# EAGLE board final-project (EAGLE 9.6.2)
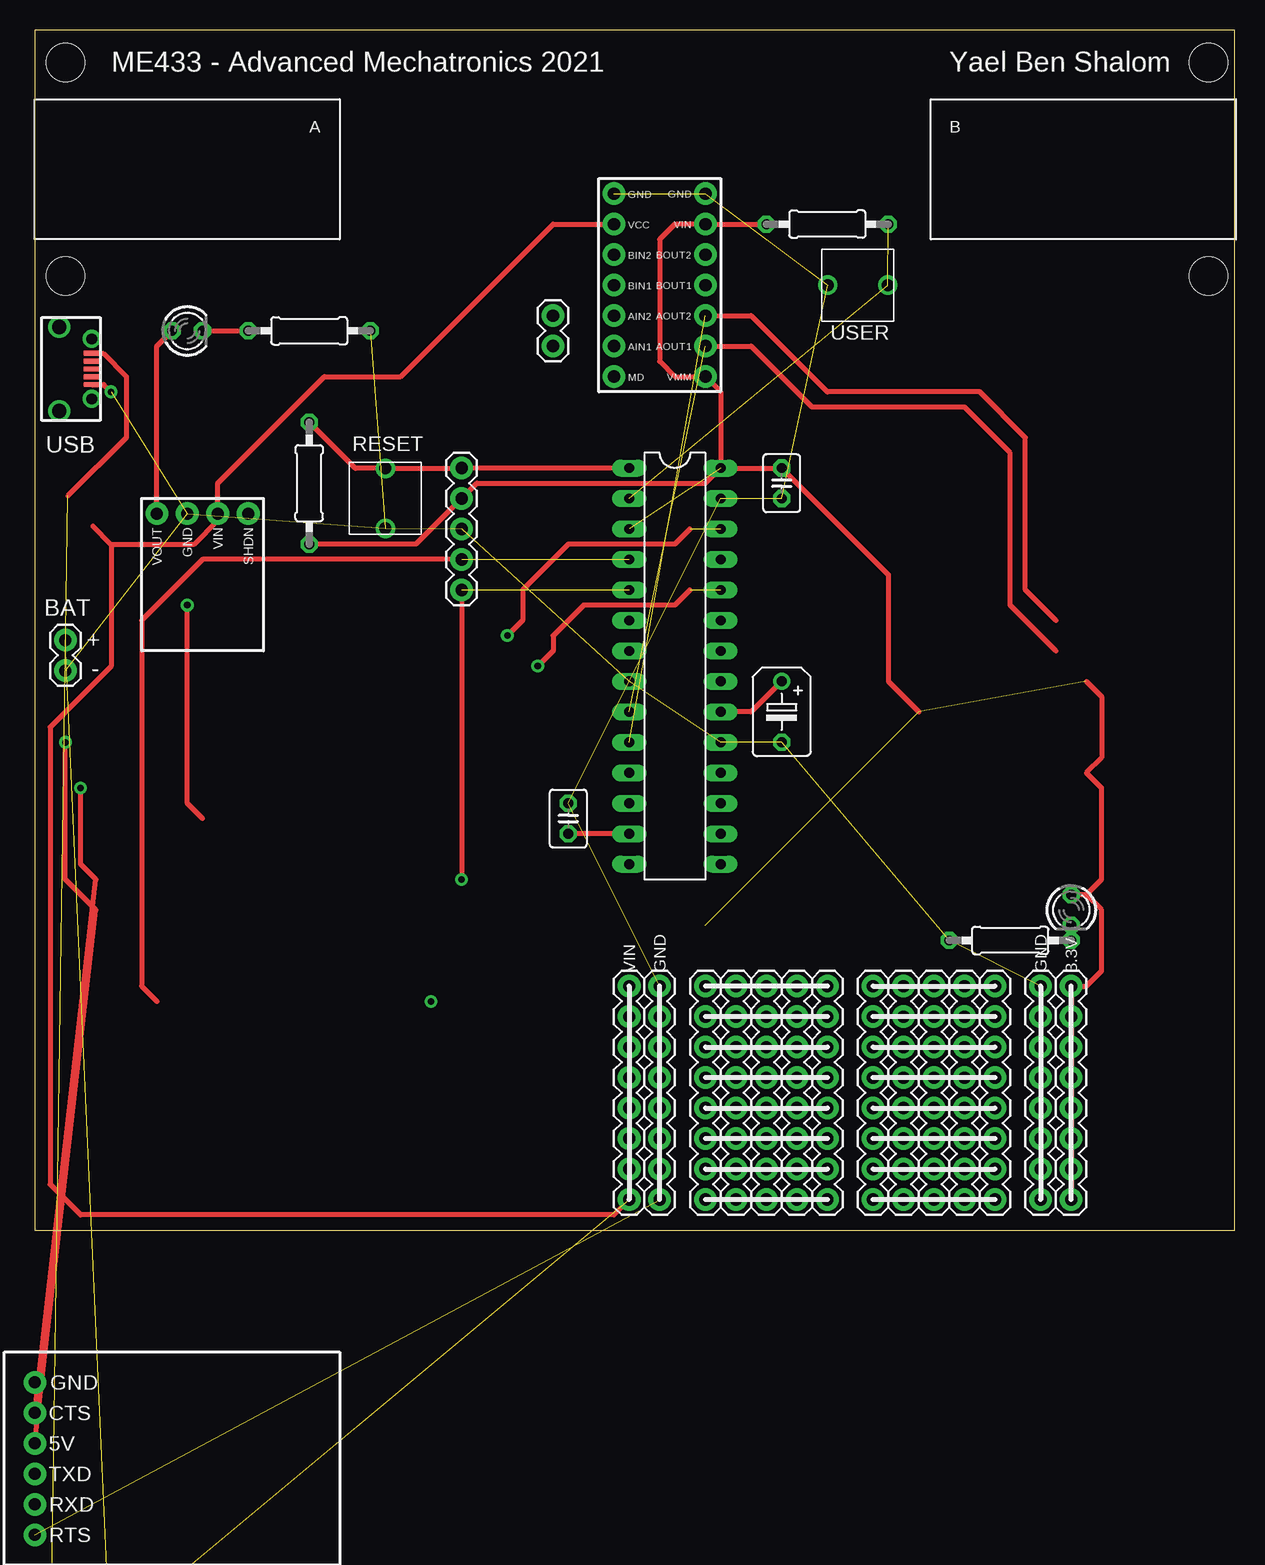
[diagram p0: board, top side]
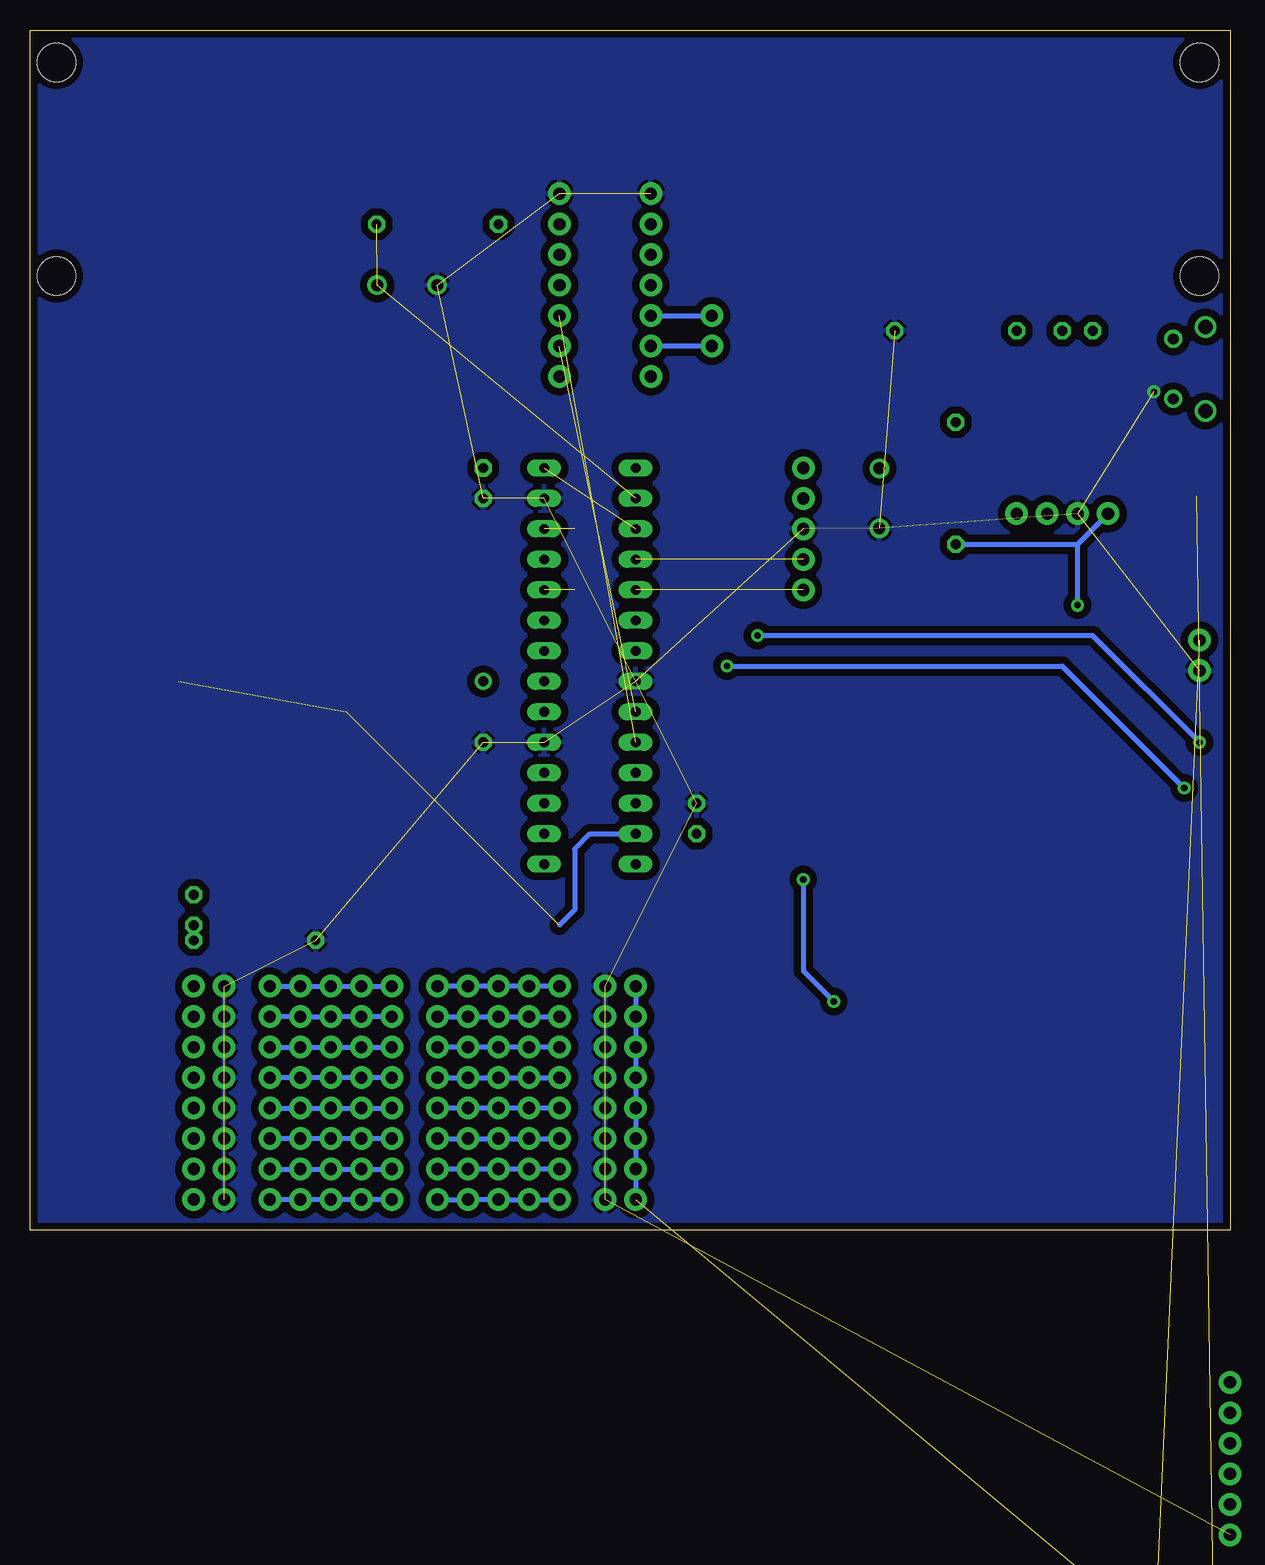
[diagram p1: board, bottom side, seen from below]

Size 100 x 100 mm. Coordinates in mm from the lower left corner, seen from the top.
Outline: 0,0 100,0 100,100 0,100 0,0
Copper layers (1*16): Top 0.035mm / dielectric 1.5mm / Bottom 0.035mm
Design rules "SparkFun": minimum track width 8mil, minimum drill 20mil, track to track 8mil, track to pad 8mil, pad to pad 8mil, via to via 8mil, smd to smd 8mil, copper to edge 8mil, drill to drill 8mil, minimum pad ring 12mil, minimum via ring 10mil, stop-mask expansion 4mil, vias tented up to drill 20mil, thermal gap 10mil
Holes 3.17 mm at 2.54,79.5 2.54,97.28 97.79,97.28 97.79,79.5

## Footprints (pad centres in the part's own frame; a part is rotated, then mirrored left to right if it is on the bottom)
1X02 = drill 1.016 pad 1.88: 1 0,0; 2 2.54,0
C025-030X050 = drill 0.813 octagon: 1 -1.27,0; 2 1.27,0
B45181B = drill 0.813: + -2.54,0 | drill 0.813 octagon: - 2.54,0
1X08 = drill 1.016 pad 1.88: 1 0,0; 2 2.54,0; 3 5.08,0; 4 7.62,0; 5 10.16,0; 6 12.7,0; 7 15.24,0; 8 17.78,0
LED3MM = drill 0.813 octagon: A -1.27,0; K 1.27,0
0207/10 = drill 0.813 octagon: 1 -5.08,0; 2 5.08,0
DIL28-3 = drill 0.813 long: 1 -16.51,-3.81; 2 -13.97,-3.81; 3 -11.43,-3.81; 4 -8.89,-3.81; 5 -6.35,-3.81; 6 -3.81,-3.81; 7 -1.27,-3.81; 8 1.27,-3.81; 9 3.81,-3.81; 10 6.35,-3.81; 11 8.89,-3.81; 12 11.43,-3.81; 13 13.97,-3.81; 14 16.51,-3.81; 15 16.51,3.81; 16 13.97,3.81; 17 11.43,3.81; 18 8.89,3.81; 19 6.35,3.81; 20 3.81,3.81; 21 1.27,3.81; 22 -1.27,3.81; 23 -3.81,3.81; 24 -6.35,3.81; 25 -8.89,3.81; 26 -11.43,3.81; 27 -13.97,3.81; 28 -16.51,3.81
SLIDE = drill 0.9: 1 -2.5,0; 2 0,0; 3 2.5,0
POLOLU3V3 = drill 1.016 pad 1.88: 1 0,3.81; 2 0,1.27; 3 0,-1.27; 4 0,-3.81
SNAP = drill 1.016 pad 1.88: 1 0,5.08; 2 0,2.54; 3 0,0; 4 0,-2.54; 5 0,-5.08
PUSH = drill 1: P$1 -2.5,0; P$2 2.5,0
FRIEND = drill 1.016 pad 1.88: 1 0,6.35; 2 0,3.81; 3 0,1.27; 4 0,-1.27; 5 0,-3.81; 6 0,-6.35
POLOLU = drill 1.016 pad 1.88: 1 -3.81,7.62; 2 -3.81,5.08; 3 -3.81,2.54; 4 -3.81,0; 5 -3.81,-2.54; 6 -3.81,-5.08; 7 -3.81,-7.62; 8 3.81,-7.62; 9 3.81,-5.08; 10 3.81,-2.54; 11 3.81,0; 12 3.81,2.54; 13 3.81,5.08; 14 3.81,7.62
MICROUSB = smd 0.4 x 1.35: 1.VBUS -1.3,2.7; 2 -0.65,2.7; 3 0,2.7; 4 0.65,2.7; 5.GND 1.3,2.7 | drill 0.9 pad 1.3: P$6 -2.5,2.7; P$7 2.5,2.7 | drill 1.2 pad 1.65: P$8 -3.5,0; P$9 3.5,0

## Placement (x,y rotation side)
BAT  [1X02]  2.54,46.61 90 top
C1  0.1uF  [C025-030X050]  44.45,34.29 90 top
C2  0.1uF  [C025-030X050]  62.23,62.23 270 top
C3  10uF  [B45181B]  62.23,43.18 270 top
J2  A  [1X02]  43.18,73.66 90 top
J16  [1X08]  66.04,2.54 90 top
J17  [1X08]  55.88,2.54 90 top
J18  [1X08]  58.42,2.54 90 top
J19  [1X08]  60.96,2.54 90 top
J20  [1X08]  63.5,2.54 90 top
J21  [1X08]  69.85,2.54 90 top
J22  [1X08]  72.39,2.54 90 top
J23  [1X08]  74.93,2.54 90 top
J24  [1X08]  77.47,2.54 90 top
J25  [1X08]  80.01,2.54 90 top
J26  [1X08]  86.36,2.54 90 top
J27  [1X08]  52.07,2.54 90 top
J28  [1X08]  83.82,2.54 90 top
J29  [1X08]  49.53,2.54 90 top
LED1  RED  [LED3MM]  12.7,74.93 0 top
LED2  GREEN  [LED3MM]  86.36,26.67 270 top
R1  330  [0207/10]  22.86,74.93 180 top
R2  10k  [0207/10]  22.86,62.23 270 top
R5  330  [0207/10]  81.28,24.13 0 top
R6  10k  [0207/10]  66.04,83.82 180 top
U1  PIC32MX170F256B  [DIL28-3]  53.34,46.99 270 top
U$1  SLIDE  [SLIDE]  3.81,-35.56 0 top  (outside the outline)
U$2  POLOLU3V3  [POLOLU3V3]  13.97,59.69 90 top
U$4  SNAP  [SNAP]  35.56,58.42 0 top
U$5  RESET  [PUSH]  29.21,60.96 90 top
U$6  FRIEND  [FRIEND]  0,-19.05 0 top  (outside the outline)
U$9  USER  [PUSH]  68.58,78.74 0 top
U$10  POLOLU  [POLOLU]  52.07,78.74 0 top
U$12  MICROUSB  [MICROUSB]  2.03,71.75 270 top

## Library data of the parts
BAT J2 LED1 LED2 U1 U$1 U$2 U$4-U$6 U$9 U$10 U$12 = ME433-2021
C1-C3 = ME433-2021; SPICEPREFIX: C
J16-J29 = ME433-2021; PROD_ID: CONN-08438
R1 R2 R5 R6 = ME433-2021; SPICEPREFIX: R

## Nets
+3V3: C1.1 C2.1 J26.1 J26.2 J26.3 J26.4 J26.5 J26.6 J26.7 J26.8 LED1.A LED2.A R2.2 R6.2 U1.3 U1.13 U1.28 U$2.1 U$4.2 U$10.8 U$10.13
+5V: U$1.1 U$12.1.VBUS
A2-ADIR: U1.9 U$10.9
A3-APWM: U1.10 U$10.10
B0-PGD: U1.4 U$4.4
B1-PGC: U1.5 U$4.5
B8-SCL: U1.17
B9-SDA: U1.18
B13-RXD: U1.24 U$6.2
B15-TXD: U1.26 U$6.3
GND: BAT.1 C1.2 C2.2 C3.- J27.1 J27.2 J27.3 J27.4 J27.5 J27.6 J27.7 J27.8 J28.1 J28.2 J28.3 J28.4 J28.5 J28.6 J28.7 J28.8 R1.1 R5.1 U1.8 U1.19 U1.27 U$2.2 U$4.3 U$5.P$1 U$6.6 U$9.P$1 U$10.1 U$10.14 U$12.5.GND
MCLR: R2.1 U1.1 U$4.1 U$5.P$2
MCLR1: R6.1 U1.2 U$9.P$2
N$1: LED1.K R1.2
N$2: C3.+ U1.20
N$5: LED2.K R5.2
N$6: J2.1 U$10.6
N$7: J2.2 U$10.5
N$21: J16.8 J17.8 J18.8 J19.8 J20.8
N$22: J16.7 J17.7 J18.7 J19.7 J20.7
N$23: J16.6 J17.6 J18.6 J19.6 J20.6
N$24: J16.5 J17.5 J18.5 J19.5 J20.5
N$25: J16.4 J17.4 J18.4 J19.4 J20.4
N$26: J16.3 J17.3 J18.3 J19.3 J20.3
N$27: J16.2 J17.2 J18.2 J19.2 J20.2
N$28: J16.1 J17.1 J18.1 J19.1 J20.1
N$29: J21.8 J22.8 J23.8 J24.8 J25.8
N$30: J21.7 J22.7 J23.7 J24.7 J25.7
N$31: J21.6 J22.6 J23.6 J24.6 J25.6
N$32: J21.5 J22.5 J23.5 J24.5 J25.5
N$33: J21.4 J22.4 J23.4 J24.4 J25.4
N$34: J21.3 J22.3 J23.3 J24.3 J25.3
N$35: J21.2 J22.2 J23.2 J24.2 J25.2
N$36: J21.1 J22.1 J23.1 J24.1 J25.1
V+: BAT.2 U$1.3
VIN: J29.1 J29.2 J29.3 J29.4 J29.5 J29.6 J29.7 J29.8 U$1.2 U$2.3 U$10.2

## Tracks (layer width: path | path; a pad name or v marks a point on that pad's centre or on a via)
+3V3  (via drill 0.55)  (3 unrouted)
  Top 0.406: U$2.1 10.16,73.66 LED1.A | R2.2 31.75,57.15 U$4.2 36.83,62.23 55.88,62.23 U1.28 | U1.28 57.15,69.85 U$10.8 53.34,71.12 52.07,72.39 52.07,82.55 53.34,83.82 U$10.13 R6.2 | U1.28 C2.1 71.12,54.61 71.12,45.72 73.66,43.18 | J26.1 J26.2 J26.3 J26.4 J26.5 J26.6 J26.7 J26.8 87.63,20.32 88.9,21.59 88.9,26.67 87.63,27.94 | U1.13 C1.1 | 13.97,34.29 12.7,35.56 v12.7,52.07 | 87.63,27.94 LED2.A | 87.63,27.94 88.9,29.21 88.9,36.83 87.63,38.1 88.9,39.37 88.9,44.45 87.63,45.72
  Bottom 0.406: R2.2 12.7,57.15 | U$2.1 12.7,57.15 | 55.88,25.4 54.61,26.67 54.61,31.75 53.34,33.02 U1.13 | v12.7,52.07 12.7,57.15
+5V  (1 unrouted)
  Top 0.406: U$12.1.VBUS 5.68,73.06 7.62,71.12 7.62,66.04 2.75,61.17
A2-ADIR  (1 unrouted)
  Top 0.406: U$10.9 59.69,73.66 64.77,68.58 77.47,68.58 81.28,64.77 81.28,52.07 85.09,48.26
A3-APWM  (1 unrouted)
  Top 0.406: 85.09,50.8 82.55,53.34 82.55,66.04 78.74,69.85 66.04,69.85 59.69,76.2 U$10.10
B0-PGD  (1 unrouted)
  Top 0.406: 10.16,19.05 8.89,20.32 8.89,50.8 13.97,55.88 U$4.4
B1-PGC  (via drill 0.55)  (1 unrouted)
  Top 0.406: U$4.5 v35.56,29.21
  Bottom 0.406: v33.02,19.05 35.56,21.59 v35.56,29.21
B13-RXD  (via drill 0.55)  (1 unrouted)
  Top 0.406: 54.61,53.34 53.34,52.07 45.72,52.07 43.18,49.53 43.18,48.26 v41.91,46.99 | U$6.2 5.08,29.21 3.81,30.48 v3.81,36.83
  Bottom 0.406: v41.91,46.99 13.97,46.99 v3.81,36.83
B15-TXD  (via drill 0.55)  (1 unrouted)
  Top 0.406: 54.61,58.42 53.34,57.15 44.45,57.15 40.64,53.34 40.64,50.8 v39.37,49.53 | U$6.3 5.08,26.67 2.54,29.21 v2.54,40.64
  Bottom 0.406: v2.54,40.64 11.43,49.53 v39.37,49.53
GND  (via drill 0.55)  (32 unrouted)
  Top 0.406: U$12.5.GND 5.75,70.45 v6.35,69.85
  pour Bottom (isolate 0.61): 100,0 100,100 0,100 0,0
MCLR
  Top 0.406: U1.1 U$4.1 29.25,63.5 U$5.P$2 26.71,63.46 R2.1
MCLR1  (2 unrouted)
N$1
  Top 0.406: LED1.K R1.2
N$2
  Top 0.406: C3.+ 59.69,43.18 U1.20
N$5
  Top 0.406: LED2.K R5.2
N$6
  Bottom 0.406: J2.1 U$10.6
N$7
  Bottom 0.406: U$10.5 J2.2
N$21
  Bottom 0.406: J17.8 J18.8 J19.8 J20.8 J16.8
N$22
  Bottom 0.406: J16.7 J20.7 J19.7 J18.7 J17.7
N$23
  Bottom 0.406: J17.6 J18.6 J19.6 J20.6 J16.6
N$24
  Bottom 0.406: J16.5 J20.5 J19.5 J18.5 J17.5
N$25
  Bottom 0.406: J17.4 J18.4 J19.4 J20.4 J16.4
N$26
  Bottom 0.406: J16.3 J20.3 J19.3 J18.3 J17.3
N$27
  Bottom 0.406: J17.2 J18.2 J19.2 J20.2 J16.2
N$28
  Bottom 0.406: J16.1 J20.1 J19.1 J18.1 J17.1
N$29
  Bottom 0.406: J25.8 J24.8 J23.8 J22.8 J21.8
N$30
  Bottom 0.406: J21.7 J22.7 J23.7 J24.7 J25.7
N$31
  Bottom 0.406: J25.6 J24.6 J23.6 J22.6 J21.6
N$32
  Bottom 0.406: J21.5 J22.5 J23.5 J24.5 J25.5
N$33
  Bottom 0.406: J25.4 J24.4 J23.4 J22.4 J21.4
N$34
  Bottom 0.406: J21.3 J22.3 J23.3 J24.3 J25.3
N$35
  Bottom 0.406: J25.2 J24.2 J23.2 J22.2 J21.2
N$36
  Bottom 0.406: J21.1 J22.1 J23.1 J24.1 J25.1
V+  (1 unrouted)
VIN  (1 unrouted)
  Top 0.406: U$10.2 43.18,83.82 30.48,71.12 24.13,71.12 15.24,62.23 U$2.3 15.24,59.13 13.24,57.12 6.38,57.12 | J29.1 48.26,1.27 3.81,1.27 1.27,3.81 1.27,41.91 6.35,46.99 6.35,57.1 6.38,57.12 | 6.38,57.12 4.83,58.67
  Bottom 0.406: J29.8 J29.7 J29.6 J29.5 J29.4 J29.3 J29.2 J29.1

## Text on the board
tPlace: ME433 - Advanced Mechatronics 2021 | Yael Ben Shalom | A | B | USB | BAT | + | - | VIN | GND | GND | 3.3V